# EAGLE board pcb_schematic (EAGLE 9.2.2)

Size 160 x 100 mm. Coordinates in mm from the lower left corner, seen from the top.
Outline: 0,0 160,0 160,100 0,100 0,0
Copper layers (1*16): Top 0.035mm / dielectric 1.5mm / Bottom 0.035mm
Design rules "default": minimum track width 6mil, minimum drill 0.35mm, track to track 6mil, track to pad 6mil, pad to pad 6mil, via to via 6mil, smd to smd 6mil, copper to edge 40mil, drill to drill 6mil, minimum pad ring 10mil, minimum via ring 8mil, stop-mask expansion 4mil, vias tented up to drill 0mil, thermal gap 10mil

## Footprints (pad centres in the part's own frame; a part is rotated, then mirrored left to right if it is on the bottom)
U1-E = drill 0.711 pad 1.219 square: 1 -2.007,0 | drill 0.711 pad 1.219: 2 0,0
CAP_C410 = drill 0.762 pad 1.27 square: 1 -10.16,0 | drill 0.762 pad 1.27: 2 0,0
STA_CF14 = drill 0.889 pad 1.397 square: 1 -11.43,0 | drill 0.889 pad 1.397: 2 0,0
DBV6 = smd 1.473 x 0.559: 1 -1.118,0.95; 2 -1.118,0; 3 -1.118,-0.95; 4 1.118,-0.95; 5 1.118,0; 6 1.118,0.95
8S2 = smd 1.575 x 0.533: 1 -3.696,1.905; 2 -3.696,0.635; 3 -3.696,-0.635; 4 -3.696,-1.905; 5 3.696,-1.905; 6 3.696,-0.635; 7 3.696,0.635; 8 3.696,1.905

## Placement (x,y rotation side)
C1  UPS1H2R2MDD1TD  [U1-E]  35.56,15.24 0 top
C2  UPS1H2R2MDD1TD  [U1-E]  41.91,19.05 0 top
C3  C410C224M5U5TA7200  [CAP_C410]  44.45,39.37 0 top
R1  CF14JT10K0  [STA_CF14]  44.45,35.56 0 top
U1  REG710NA-3.3/3K  [DBV6]  35.56,22.86 0 top
U2  ATTINY85V-10SU  [8S2]  52.07,17.78 0 top

## Library data of the parts
C1 C2 = 2.2ufCap; MANUFACTURER_PART_NUMBER: UPS1H2R2MDD1TD; VENDOR: Nichicon
C3 = 22ufcap; MANUFACTURER_PART_NUMBER: C410C224M5U5TA7200; VENDOR: KEMET
R1 = 10k Resistor; MANUFACTURER_PART_NUMBER: CF14JT10K0; VENDOR: Stackpole International
U1 = voltage_reg; MANUFACTURER_PART_NUMBER: REG710NA3.33K; VENDOR: Texas Instruments
U2 = attiny85; MANUFACTURER_PART_NUMBER: ATTINY85V10SU; VENDOR: Atmel

## Nets
GND: C1.2 R1.1 U1.2 U2.4
N$1: C1.1 U1.1 U2.8
N$2: C3.1 U1.6
N$3: C3.2 U1.4
N$4: C2.1 U1.5
N$5: R1.2 U2.5
VCC: C2.2

## Tracks (layer width: path | path; a pad name or v marks a point on that pad's centre or on a via)
GND  (3 unrouted)
N$1  (2 unrouted)
N$2  (1 unrouted)
N$3  (1 unrouted)
N$4  (1 unrouted)
N$5  (1 unrouted)